# Altium PCB UE-12864LCD-V1.0.PcbDoc (part 2 of 2)
Units mm, origin at the board's own origin, x right, y up, seen from the top; angles counter-clockwise.
Board outline 230.2 x 185.24 mm, 2 copper layers (Top Layer, Bottom Layer); 288 components, 149 nets, 862 pads, 465 vias.
Unrouted connection lines stored in the file: 29.
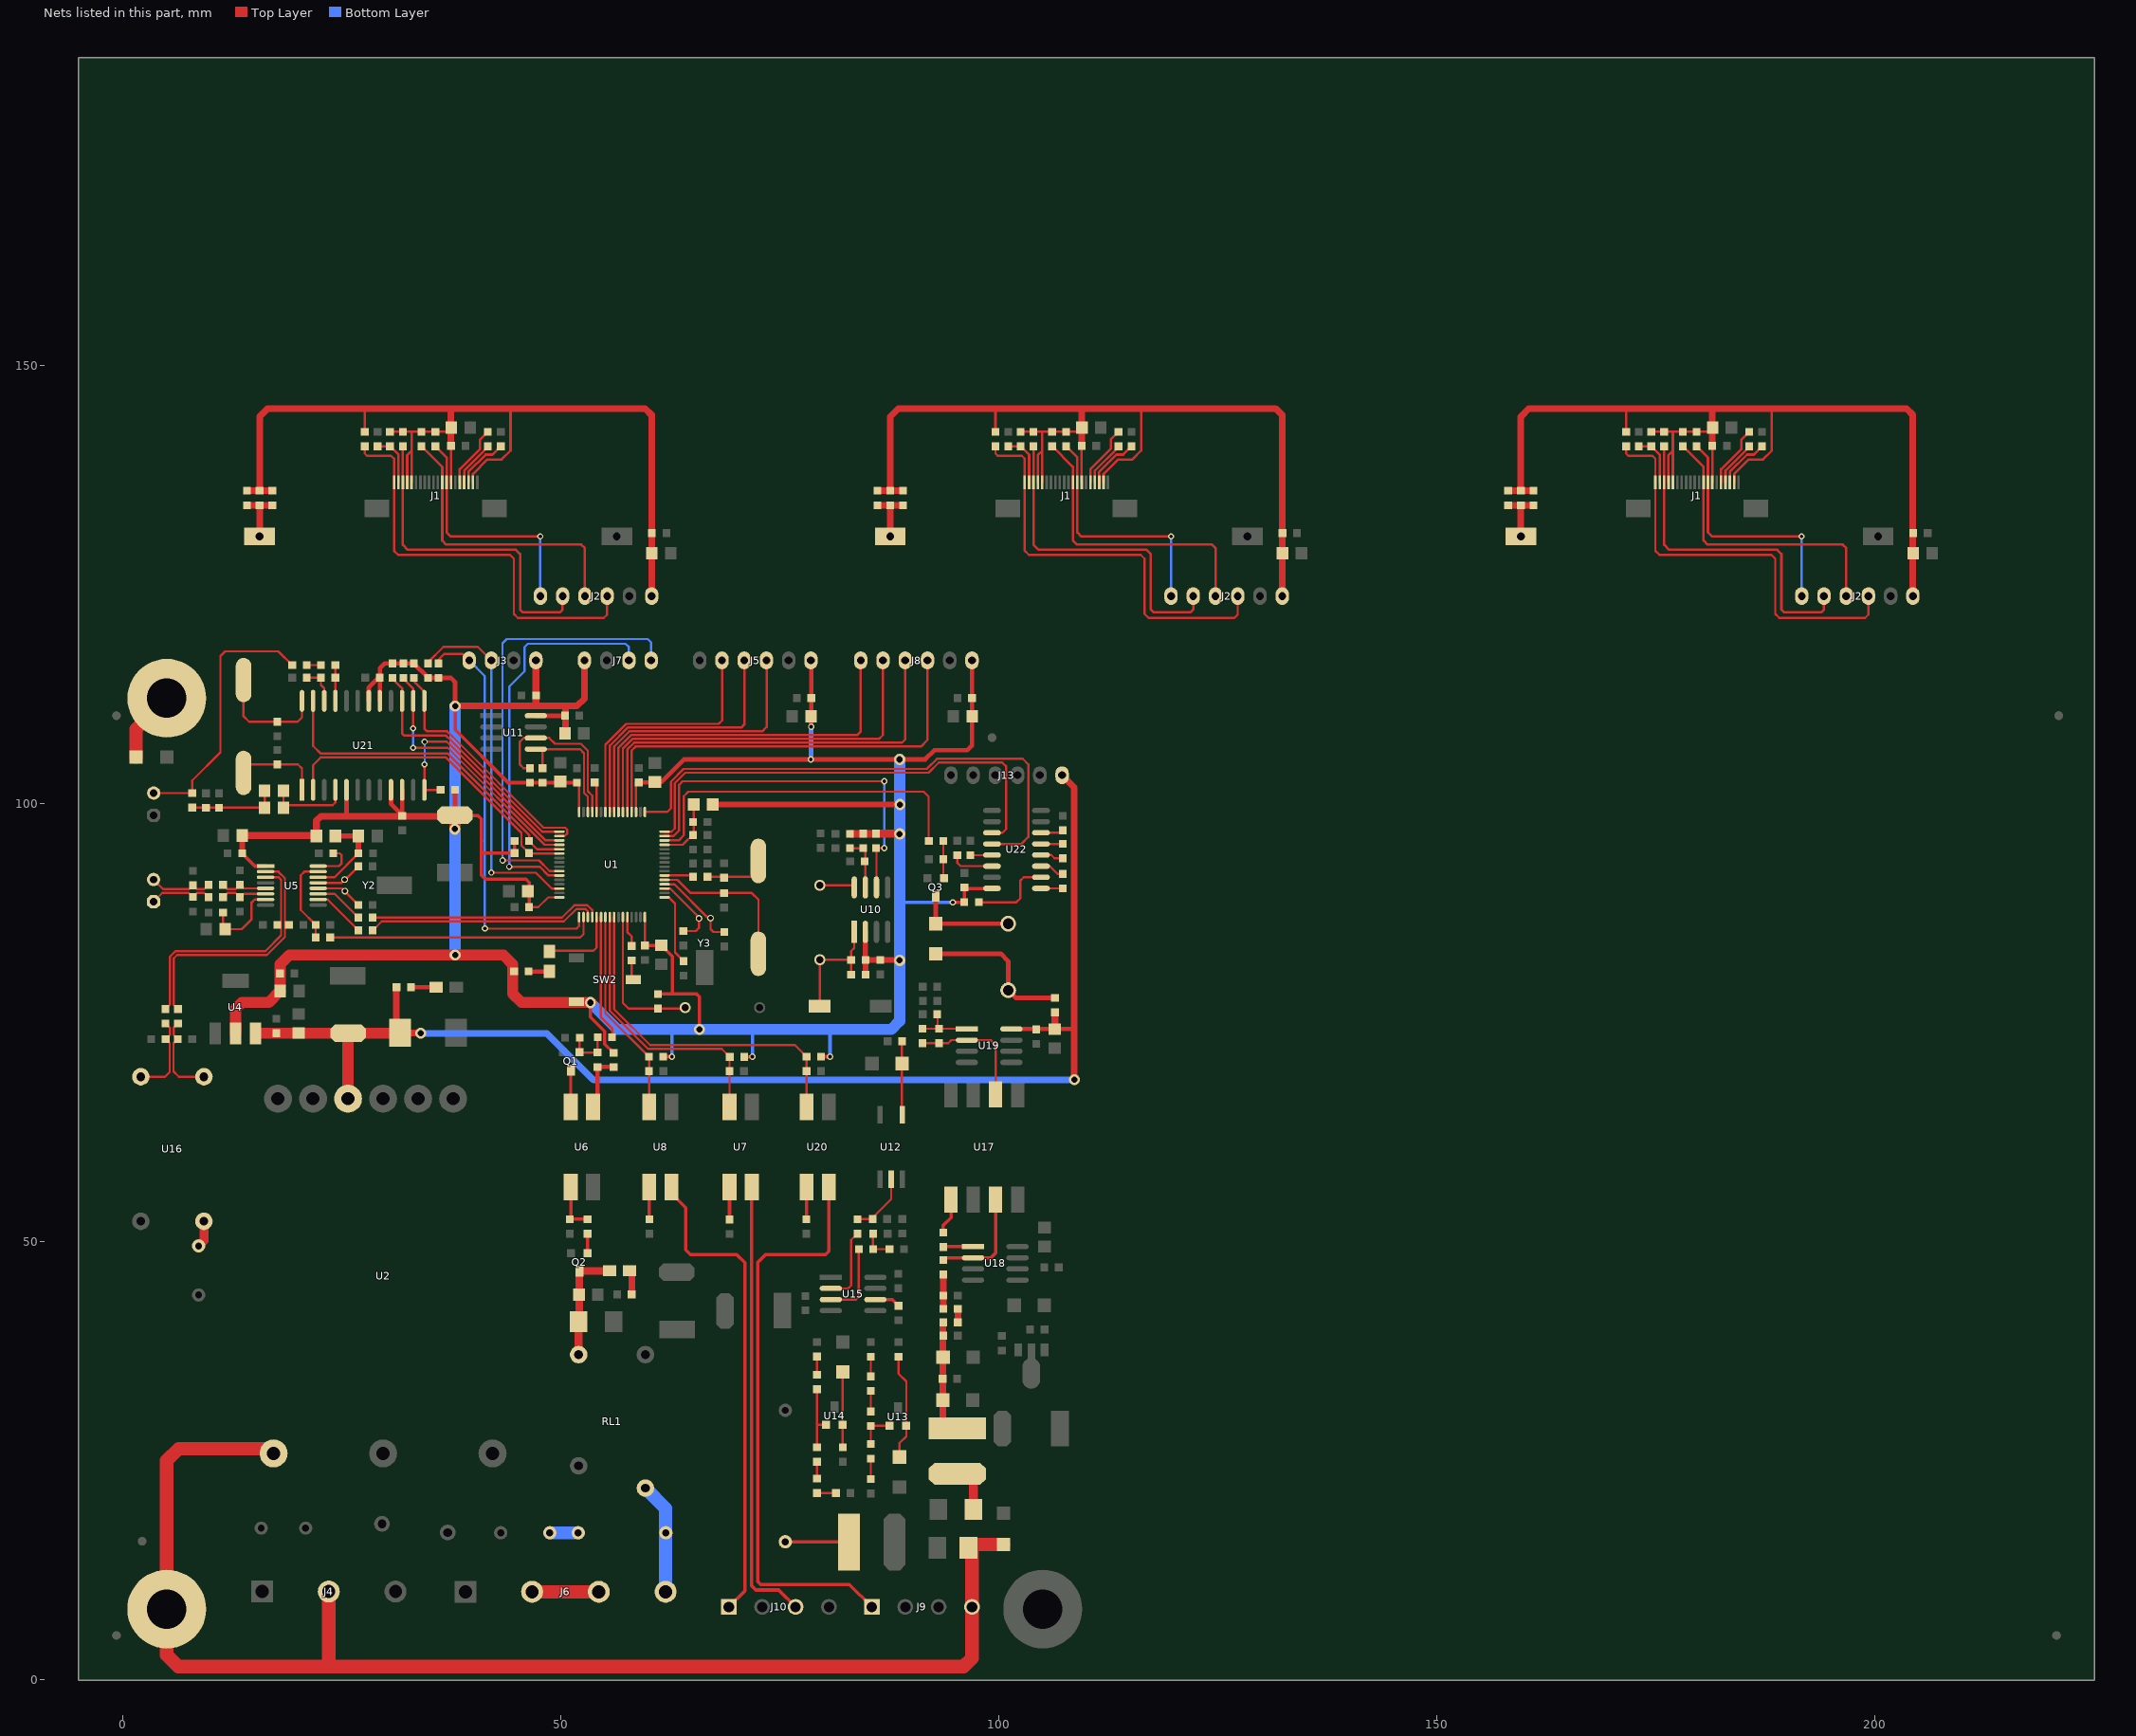
[diagram p2: the nets of this part, all layers, seen from the top]

## Via types
v1: diameter 0.711, hole 0.406, Top Layer to Bottom Layer, tented both sides, 452 vias
v2: diameter 1.27, hole 0.711, Top Layer to Bottom Layer, tented both sides, 13 vias

## Nets (pads, with @x,y where several pads share a name; then routed paths per layer and width w, separated by ;. In a path a pad name is that pad's centre, name@x,y a point inside that pad or via, vN(x,y) a via of type N, cw(c..) or ccw(c..) an arc to the next point about the centre after c; other vN are vias at no path point) (continued)
DIS_RES: C1.2@29.058,140.754 C1.2@101.058,140.754 C1.2@173.058,140.754 J1.2 R1.2@30.48,140.754 R1.2@102.48,140.754 R1.2@174.48,140.754 | length 17.8
  Top Layer w0.279: C1.2@29.058,140.754 R1.2@30.48,140.754 31.448,139.785 J1.2@31.448,136.639 ; C1.2@101.058,140.754 R1.2@102.48,140.754 103.448,139.785 J1.2@103.448,136.639 ; C1.2@173.058,140.754 R1.2@174.48,140.754 175.448,139.785 J1.2@175.448,136.639
DP3V3: C2.2@60.389,130.835 C2.2@132.389,130.835 C2.2@204.389,130.835 C3.1@96.965,109.931 C3.2@37.452,140.792 C3.2@109.452,140.792 C3.2@181.452,140.792 C4.1@60.389,128.549 C4.1@132.389,128.549 C4.1@204.389,128.549 C4.2@96.939,112.014 C5.1@37.478,142.9 C5.1@109.478,142.9 C5.1@181.478,142.9 C7.1@17.945,78.562 C8.1 C13.1 C14.1 C15.1 C16.1 C27.2 C29.1 C30.1 C31.1 C32.1 C33.1 C34.1 C35.1 C36.1 C42.1 C43.1 C44.2 C45.1 C71.1 C76.2 C79.2 C80.2 EC5.1 FB1.1 J1.4 J1.5 J1.14 J1.19 J2.1 J3.4 J5.6 J7.1 J8.6 LF1.1 R1.1@30.48,142.405 R1.1@102.48,142.405 R1.1@174.48,142.405 R1.2@36.017,114.313 R2.2 R3.1@61.087,78.219 R3.2@34.087,142.405 R3.2@106.087,142.405 R3.2@178.087,142.405 R4.2 R5.2 R6.1 R7.1@14.148,135.674 R7.1@86.148,135.674 R7.1@158.148,135.674 R8.1@17.043,135.674 R8.1@89.043,135.674 R8.1@161.043,135.674 R12.2 R14.2 R25.2 R27.2 R32.2 R34.1 R35.1 R36.1 R37.1 R38.1 R73.2 R76.2 R77.2 R78.2 R79.2 R80.2 R81.2 SW2.3 U1.19 U1.32 U1.48 U1.64 U4.2 U5.1 U10.2 U11.8 U21.5 U21.9 U21.10 U21.17 U21.18 U22.16 | length 791.9
  Top Layer w0.254: C30.1@46.368,88.138 47.422,88.138 48.539,89.256 U1.48@49.824,89.256 ; U1.32@52.074,99.006 C36.1@52.074,102.353 ; U1.19@58.574,99.006 C34.1@58.574,102.374 ; C32.1@59.574,83.771 U1.64@59.574,87.006
  Top Layer w0.279: R2.2@27.61,142.405 27.61,144.932 27.737,145.059 ; R1.1@30.48,142.405 32.969,142.405 ; J1.4@32.448,136.639 32.448,139.738 32.948,140.238 ; J1.5@32.948,136.639 32.948,142.384 32.969,142.405 ; 37.44,145.059 37.448,145.051 ; J1.14@37.448,136.639 C3.2@37.448,140.754 ; C5.1@37.448,142.405 R5.2@35.662,142.405 32.969,142.405 ; J1.19@39.948,136.639 39.948,137.586 41.605,139.243 43.231,139.243 44.247,140.259 44.247,144.983 44.171,145.059 ; R2.2@99.61,142.405 99.61,144.932 99.737,145.059 ; R1.1@102.48,142.405 104.969,142.405 ; J1.4@104.448,136.639 104.448,139.738 104.948,140.238 ; J1.5@104.948,136.639 104.948,142.384 104.969,142.405 ; R5.2@107.662,142.405 104.969,142.405 ; R5.2@107.662,142.405 C5.1@109.448,142.405 ; 109.44,145.059 109.448,145.051 ; J1.14@109.448,136.639 C3.2@109.448,140.754 ; J1.19@111.948,136.639 111.948,137.586 113.605,139.243 115.231,139.243 116.247,140.259 116.247,144.983 116.171,145.059 ; R2.2@171.61,142.405 171.61,144.932 171.737,145.059 ; R1.1@174.48,142.405 176.969,142.405 ; J1.4@176.448,136.639 176.448,139.738 176.948,140.238 ; J1.5@176.948,136.639 176.948,142.384 176.969,142.405 ; R5.2@179.662,142.405 176.969,142.405 ; R5.2@179.662,142.405 C5.1@181.448,142.405 ; 181.44,145.059 181.448,145.051 ; J1.14@181.448,136.639 C3.2@181.448,140.754 ; J1.19@183.948,136.639 183.948,137.586 185.605,139.243 187.231,139.243 188.247,140.259 188.247,144.983 188.171,145.059
  Top Layer w0.381: C14.1@13.602,94.285 15.062,92.824 U5.1@16.279,92.824 ; v2(37.922,111.1) 37.922,108.397 43.97,102.349 R34.1@46.457,102.349 ; EC5.1@38.165,98.603 40.513,98.603 40.919,98.196 40.919,95.656 ; 40.97,95.707 40.919,95.656 ; R81.2@44.717,95.707 R80.2@44.717,94.31 40.945,94.31 40.919,94.336 ; C30.1@46.368,88.138 46.368,90.957 45.987,91.338 41.377,91.338 40.919,91.796 40.919,94.336 ; R34.1@46.558,102.349 C36.1@51.816,102.349 ; v2(53.365,77.241) 53.365,75.603 55.004,73.965 55.004,72.517 R14.2@56.007,71.514 ; C32.1@59.588,83.757 59.614,83.782 C31.1@61.443,83.782 62.713,82.512 62.713,78.219 ; R3.1@61.087,78.219 65.494,78.219 65.811,77.902 v2(65.811,74.168) ; R27.2@61.684,71.069 v1(62.662,71.069) ; R25.2@70.93,71.044 71.831,71.044 v1(71.857,71.069) ; R73.2@79.693,71.069 v1(80.721,71.069) ; v1(94.742,88.697) C79.2@96.05,88.697 ; C80.2@95.961,90.279 U22.16@99.217,90.279 ; C79.2@96.025,88.748 96.063,88.786 C80.2@96.063,90.386 C80.2@96.083,90.406 ; 40.919,94.336 40.919,95.656
  Top Layer w0.508: 25.518,98.574 U21.5@25.518,101.527 ; U21.18@28.058,111.687 28.058,113.211 C71.1@29.172,114.325 ; U21.17@29.328,111.687 29.328,115.421 29.87,115.964 R76.2@30.785,115.964 R78.2@32.004,115.964 R77.2@33.198,115.964 34.849,114.313 R1.2@36.017,114.313 37.427,114.313 37.922,113.817 v2(37.922,111.1) ; U21.9@30.598,101.527 30.598,99.933 31.55,98.98 C76.2@31.868,98.98 ; U21.10@31.868,101.527 C76.2@31.868,98.98 ; C76.2@31.877,98.971 C76.2@31.868,98.98 ; R79.2@37.91,101.524 37.91,98.859 EC5.1@38.165,98.603 ; U11.8@47.136,109.988 50.501,109.988 C42.1@50.521,110.007 ; C34.1@58.877,102.375 C29.1@60.731,102.375 ; C29.1@60.731,102.426 61.481,102.426 64.059,105.004 v1(78.537,105.004) v2(88.671,105.004) 91.592,105.004 92.634,106.045 96.393,106.045 96.926,106.578 J8.6@96.926,116.307 ; J5.6@78.537,116.307 78.575,116.269 C15.1@78.575,112.014 C16.1@78.575,109.931 ; C16.1@78.55,109.931 78.55,108.75 v1(78.562,108.737)
  Top Layer w0.635: C14.1@13.602,94.285 C13.1@13.602,96.317 ; FB1.1@67.323,99.873 88.671,99.873 v2(88.697,99.847) ; U10.2@84.754,85.312 84.754,82.156 C43.1@84.786,82.124 ; R32.2@84.786,80.422 C43.1@84.786,82.124 ; v2@88.671,82.093 84.817,82.093 C43.1@84.786,82.124
  Top Layer w0.762: C13.1@13.602,96.317 22.035,96.317 LF1.1@22.085,96.266 22.085,98.006 22.606,98.527 37.581,98.527 EC5.1@37.911,98.857 ; R7.1@14.148,135.674 R6.1@15.596,135.674 ; R8.1@17.043,135.674 R6.1@15.596,135.674 ; C3.2@37.448,140.754 C5.1@37.448,142.405 ; C5.1@37.448,142.443 37.448,145.051 ; v2(37.922,111.1) 47.117,111.1 ; J3.4@47.142,116.307 47.142,111.125 47.117,111.1 ; C44.2@50.457,107.975 50.521,108.039 50.521,110.007 50.521,111.1 ; J7.1@52.68,116.307 52.68,111.938 51.841,111.1 50.521,111.1 ; J2.1@60.35,123.647 60.35,144.323 59.614,145.059 44.171,145.059 37.44,145.059 27.737,145.059 16.51,145.059 15.596,144.145 R6.1@15.596,135.674 ; R7.1@86.148,135.674 R6.1@87.596,135.674 ; R8.1@89.043,135.674 R6.1@87.596,135.674 ; C3.2@109.448,140.754 C5.1@109.448,142.405 ; C5.1@109.448,142.443 109.448,145.051 ; J2.1@132.35,123.647 132.35,144.323 131.614,145.059 116.171,145.059 109.44,145.059 99.737,145.059 88.51,145.059 87.596,144.145 R6.1@87.596,135.674 ; R7.1@158.148,135.674 R6.1@159.596,135.674 ; R8.1@161.043,135.674 R6.1@159.596,135.674 ; C3.2@181.448,140.754 C5.1@181.448,142.405 ; C5.1@181.448,142.443 181.448,145.051 ; J2.1@204.35,123.647 204.35,144.323 203.614,145.059 188.171,145.059 181.44,145.059 171.737,145.059 160.51,145.059 159.596,144.145 R6.1@159.596,135.674 ; 47.117,111.1 50.521,111.1
  Top Layer w0.889: R38.1@83.147,96.52 86.246,96.52 86.258,96.533 v2@88.468,96.533
  Top Layer w1.27: U4.2@12.852,73.733 12.852,76.556 13.564,77.267 16.65,77.267 C7.1@17.932,78.549 ; C7.1@17.932,79.235 17.932,81.61 18.999,82.677 v2(37.922,82.677) 43.434,82.677 44.501,81.61 44.501,78.257 45.491,77.267 53.391,77.267 v2(53.365,77.241) ; EC5.1@37.911,98.857 37.922,98.846 v2@37.922,97.053
  Bottom Layer w0.381: 62.56,74.168 62.662,74.066 v1(62.662,71.069) ; v1(71.857,71.069) 71.857,74.168 ; v1(80.721,71.069) 80.721,74.168 ; 88.671,88.29 89.078,88.697 v1(94.742,88.697)
  Bottom Layer w0.508: v1(78.537,105.004) 78.562,105.029 v1(78.562,108.737)
  Bottom Layer w0.635: v2@88.671,99.847 v2(88.697,99.847)
  Bottom Layer w1.27: v2(37.922,82.677) v2(37.922,111.1) ; v2(53.365,77.241) 56.439,74.168 62.56,74.168 v2(65.811,74.168) 71.857,74.168 80.721,74.168 87.706,74.168 88.671,75.133 v2(88.671,82.067) 88.671,88.29 v2(88.671,96.495) 88.671,99.847 v2(88.671,105.004)
  other v2: 37.897,97.053
DVDD: C18.1 C19.1 LF1.2 U5.14 | length 10.3
  Top Layer w0.254: U5.14@22.279,91.554 24.155,91.554 C19.1@26.886,94.285
  Top Layer w0.635: LF1.2@24.244,96.266 26.861,96.266 C19.1@26.861,94.323
FG: C103.1 J4.2 J9.4 LT1.2 pad.1@5,8 pad.1@5.004,111.989 TVS1.1 U2.1 | length 161.7
  Top Layer w1.524: C103.1@1.473,105.283 1.473,108.458 pad.1@5.004,111.989 ; U2.1@17.193,26.334 6.344,26.334 4.98,24.97 4.98,2.767 6.299,1.448 24,1.448 ; J4.2@23.495,10.008 23.495,1.953 24,1.448 ; LT1.2@100.508,15.392 96.92,15.392 TVS1.1@96.528,15 96.926,14.602 J9.4@96.926,8.255 96.926,2.413 95.961,1.448 24,1.448
FM_IRQ: R80.1 U1.38 U21.2 | length 36.7
  Top Layer w0.254: U21.2@21.708,101.527 21.708,104.357 22.581,105.23 36.883,105.23 45.491,96.622 45.491,95.186 R80.1@46.368,94.31 46.422,94.256 U1.38@49.824,94.256
FM_RST: R81.1 U1.37 U21.23 | length 38.6
  Top Layer w0.254: U21.23@21.708,111.687 21.708,106.537 22.583,105.662 37.107,105.662 46.368,96.402 46.368,95.669 47.281,94.756 U1.37@49.824,94.756
IN-ADA: R67.2 U17.3 U18.2 | length 12.4
  Top Layer w0.381: R67.2@93.65,47.841 93.923,48.114 U18.2@97.047,48.114 99.066,48.114 99.621,48.668 U17.3@99.621,54.754
LED_CHARGE1/RESET1: J5.3 U1.25 | length 31.3
  Top Layer w0.254: U1.25@55.574,99.006 55.574,106.582 57.627,108.636 70.587,108.636 70.942,108.991 70.942,116.281 J5.3@70.917,116.307
LED_PWR1/CLK: J5.2 U1.26 | length 29
  Top Layer w0.254: U1.26@55.074,99.006 55.074,106.693 57.448,109.068 67.996,109.068 68.402,109.474 68.402,116.281 J5.2@68.377,116.307
LED_WARNING/RESET2: J5.4 U1.24 | length 33.4
  Top Layer w0.254: U1.24@56.074,99.006 56.074,106.471 57.806,108.204 72.974,108.204 73.482,108.712 73.482,116.281 J5.4@73.457,116.307
NetC6_1: C6.1@41.656,140.754 C6.1@113.656,140.754 C6.1@185.656,140.754 J1.17 | length 15.7
  Top Layer w0.279: J1.17@38.948,136.639 38.948,137.983 41.656,140.691 C6.1@41.656,140.754 ; J1.17@110.948,136.639 110.948,137.983 113.656,140.691 C6.1@113.656,140.754 ; J1.17@182.948,136.639 182.948,137.983 185.656,140.691 C6.1@185.656,140.754
NetC6_2: C6.2@41.656,142.405 C6.2@113.656,142.405 C6.2@185.656,142.405 J1.16 | length 21.3
  Top Layer w0.279: J1.16@38.448,136.639 38.448,138.143 40.767,140.462 40.767,141.516 C6.2@41.656,142.405 ; J1.16@110.448,136.639 110.448,138.143 112.767,140.462 112.767,141.516 C6.2@113.656,142.405 ; J1.16@182.448,136.639 182.448,138.143 184.767,140.462 184.767,141.516 C6.2@185.656,142.405
NetC7_1: C7.1@43.129,140.754 C7.1@115.129,140.754 C7.1@187.129,140.754 J1.18 | length 18.3
  Top Layer w0.279: J1.18@39.448,136.639 39.448,137.836 41.414,139.802 42.177,139.802 C7.1@43.129,140.754 ; J1.18@111.448,136.639 111.448,137.836 113.414,139.802 114.177,139.802 C7.1@115.129,140.754 ; J1.18@183.448,136.639 183.448,137.836 185.414,139.802 186.177,139.802 C7.1@187.129,140.754
NetC9_1: C9.1 U1.1 | length 8.5
  Top Layer w0.254: U1.1@61.824,89.256 62.306,89.256 63.017,88.544 63.017,82.969 C9.1@64.008,81.978
NetC10_1: C10.1 U5.16 | length 4.8
  Top Layer w0.254: U5.16@22.279,92.824 24.651,92.824 24.968,93.142 24.968,94.056 24.74,94.285 C10.1@24.016,94.285
NetC17_2: C17.2 D1.1 L3.2 Q2.2 RL1.1 | length 13.1
  Top Layer w0.9: RL1.1@52.019,37.059 52.026,37.065 D1.1@52.026,40.818 52.097,40.889 Q2.2@52.097,46.615 55.52,46.615 L3.2@55.548,46.643
NetC20_1: C20.1 R15.1 Y1.2 | length 7.4
  Top Layer w0.254: R15.1@66.739,91.618 72.288,91.618 Y1.2@72.288,93.438
NetC21_1: C21.1 R19.2 | length 3.2
  Bottom Layer w1.5: R19.2@48.729,16.713 C21.1@51.972,16.713
NetC22_1: C22.1 R14.1 U6.1 | length 6.6
  Top Layer w0.508: U6.1@53.663,65.326 54.174,65.838 C22.1@54.174,69.892 55.978,69.892 R14.1@56.007,69.863
NetC22_2: C22.2 Q1.1 R17.1 R20.1 | length 5.5
  Top Layer w0.254: R20.1@52.134,73.228 52.134,71.549 52.14,71.543 C22.2@54.174,71.543 54.191,71.559 R17.1@54.191,73.279
NetC24_1: C24.1 C25.1 U5.7 | length 9.1
  Top Layer w0.254: C25.1@11.417,87.528 11.417,85.877 C24.1@11.671,85.623 13.551,85.623 14.681,86.754 14.681,88.671 15.024,89.014 U5.7@16.279,89.014
NetC43_2: C43.2 R32.1 SW3.1 SW4.1 U10.1 | length 13.9
  Top Layer w0.254: SW4.1@79.533,76.835 79.564,76.866 SW3.1@79.564,82.133 83.126,82.133 C43.2@83.135,82.124 ; R32.1@83.135,80.422 C43.2@83.135,82.124 ; U10.1@83.484,85.312 83.484,83.464 83.135,83.116 C43.2@83.135,82.124
NetC48_1: C48.1 D5.2 U13.3 | length 12.2
  Top Layer w0.254: C48.1@88.546,36.823 88.546,34.873 89.431,33.987 U13.3@89.431,28.924 89.431,27.735 88.646,26.949 D5.2@88.646,25.362
NetC49_2: C49.2 R37.2 R48.1 U10.7 | length 6.5
  Top Layer w0.254: R48.1@82.995,94.869 84.506,94.869 84.506,95.098 84.754,94.85 U10.7@84.754,90.392
NetC53_1: C53.1 D2.2 U14.3 | length 8.6
  Top Layer w0.254: C53.1@82.169,26.479 82.171,26.481 D2.2@82.171,35.065
NetC58_1: C58.1 R68.1 R70.1 U19.1 | length 6.9
  Top Layer w0.254: C58.1@91.272,74.261 R68.1@93.177,74.26 ; R70.1@93.205,75.946 93.015,75.755 93.015,74.423 R68.1@93.177,74.26 ; U19.1@96.346,74.229 96.314,74.261 R68.1@93.177,74.26
NetC58_2: C58.2 R68.2 U17.6 U19.2 | length 14.4
  Top Layer w0.254: C58.2@91.272,72.61 94.225,72.61 94.574,72.959 U19.2@96.346,72.959 99.076,72.959 99.621,72.413 U17.6@99.621,66.754
NetC59_1: C59.1 C60.1 DC2.1 DC3.1 L5.2 R65.1 | length 13.7
  Top Layer w0.762: R65.1@93.663,40.742 93.59,40.669 93.59,28.61 L5.2@95.148,28.61
NetC68_2: C68.2 R74.2 | length 1.6
  Top Layer w0.254: C68.2@20.968,115.773 R74.2@22.593,115.773
NetC69_1: C69.1 R75.1 U21.22 | length 4.4
  Top Layer w0.254: C69.1@20.968,114.325 R75.1@22.593,114.325 22.593,113.5 22.978,113.115 U21.22@22.978,111.687
NetC74_1: C74.1 U21.1 Y4.1 | length 9.6
  Top Layer w0.254: Y4.1@13.614,104.149 13.898,104.432 17.958,104.432 19.977,104.432 20.438,103.971 U21.1@20.438,101.527
NetC75_2: C75.2 U21.24 Y4.2 | length 13.8
  Top Layer w0.254: Y4.2@13.614,114.063 Y4.2@13.614,114.749 ; Y4.2@13.767,114.063 13.767,109.931 14.389,109.309 C75.2@17.628,109.309 19.952,109.309 20.438,109.795 U21.24@20.438,111.687
NetC77_1: C77.1 U22.3 | length 2.9
  Top Layer w0.254: U22.3@104.805,92.819 105.809,92.819 106.693,91.935 C77.1@107.29,91.935
NetC77_2: C77.2 U22.1 | length 2.5
  Top Layer w0.254: U22.1@104.805,90.279 107.284,90.279 C77.2@107.29,90.284
NetC78_1: C78.1 U22.5 | length 2.5
  Top Layer w0.254: U22.5@104.805,95.359 107.284,95.359 C78.1@107.29,95.364
NetC78_2: C78.2 U22.4 | length 2.6
  Top Layer w0.254: U22.4@104.805,94.089 105.961,94.089 106.337,93.713 C78.2@107.29,93.713
NetC79_1: C79.1 U22.2 | length 9.5
  Top Layer w0.254: C79.1@97.701,88.697 101.981,88.697 102.464,89.179 102.464,91.186 102.827,91.549 U22.2@104.805,91.549
NetC81_2: C81.2 U22.6 | length 2.6
  Top Layer w0.254: U22.6@104.805,96.629 107.005,96.629 C81.2@107.29,96.914
NetD3_1: D3.1 Q3.2 U9.2 | length 11.7
  Top Layer w0.508: Q3.2@92.788,89.618 92.788,86.248 D3.1@92.786,86.246 101.064,86.246 U9.2@101.067,86.248
NetD3_2: D3.2 R33.1 U9.1 | length 17.6
  Top Layer w0.508: D3.2@92.786,82.817 100.216,82.817 101.067,81.966 U9.1@101.067,78.648 101.927,77.787 R33.1@106.401,77.787
NetD4_2: D4.2 R45.2 U12.1 | length 8.5
  Top Layer w0.254: R45.2@88.938,72.949 88.938,64.488 U12.1@88.972,64.454
NetD6_2: D6.2 L5.1 | length 5.9
  Top Layer w1.016: L5.1@95.148,23.41 96.91,23.41 97.098,23.222 D6.2@97.098,19.38
NetJ3_1: J3.1@15.596,130.454 J3.1@87.596,130.454 J3.1@159.596,130.454 R6.2 R7.2@14.148,134.023 R7.2@86.148,134.023 R7.2@158.148,134.023 R8.2@17.043,134.023 R8.2@89.043,134.023 R8.2@161.043,134.023 | length 19.4
  Top Layer w0.762: R7.2@14.148,134.023 R6.2@15.596,134.023 ; J3.1@15.596,130.454 R6.2@15.596,134.023 ; R8.2@17.043,134.023 R6.2@15.596,134.023 ; R7.2@86.148,134.023 R6.2@87.596,134.023 ; J3.1@87.596,130.454 R6.2@87.596,134.023 ; R8.2@89.043,134.023 R6.2@87.596,134.023 ; R7.2@158.148,134.023 R6.2@159.596,134.023 ; J3.1@159.596,130.454 R6.2@159.596,134.023 ; R8.2@161.043,134.023 R6.2@159.596,134.023
NetJ6_2: J6.2 J6.3 | length 15.2
  Top Layer w1.5: J6.2@46.711,9.982 J6.3@54.331,9.982
  Bottom Layer w1.5: J6.2@46.711,9.982 J6.3@54.331,9.982
NetJ11_1: J11.1 R60.1 R62.1 | length 7.3
  Top Layer w0.254: J11.1@3.483,88.75 4.497,89.764 7.506,89.764 R60.1@7.976,89.294 8.445,89.764 9.284,89.764 R62.1@9.766,89.281
NetJ11_2: J11.2 R53.1 R57.2 | length 7.3
  Top Layer w0.254: J11.2@3.483,91.29 4.577,90.195 7.531,90.195 R57.2@7.976,90.64 8.42,90.195 9.284,90.195 R53.1@9.766,90.678
NetL1_1: L1.1 R8.2@32.88,78.994 | length 2.9
  Top Layer w0.508: R8.2@32.88,78.994 L1.1@35.757,78.994
NetL2_1: L2.1 R12.1 | length 2.4
  Top Layer w0.508: R12.1@46.292,80.797 L2.1@48.692,80.797
NetL3_1: L3.1 R13.1 | length 2.8
  Top Layer w0.762: L3.1@57.834,46.643 58.077,46.4 R13.1@58.077,43.917
NetL4_2: L4.2 R23.2 | length 7.3
  Top Layer w0.381: R23.2@75.616,15.69 82.878,15.69 L4.2@82.896,15.672
NetLF2_2: LF2.2 LF3.2 U21.4 | length 9.6
  Top Layer w0.254: LF2.2@18.326,101.448 LF3.2@18.326,99.466 18.631,99.771 23.927,99.771 24.248,100.092 U21.4@24.248,101.527
NetQ1_2: Q1.2 U6.2 | length 4.2
  Top Layer w0.308: U6.2@51.123,65.326 51.123,69.5 Q1.2@51.154,69.532
NetQ2_1: Q2.1 R21.2 | length 2.2
  Top Layer w0.381: R21.2@53.035,50.863 53.035,48.675 Q2.1@53.063,48.647
NetQ3_1: Q3.1 R47.1 R49.2 | length 4.3
  Top Layer w0.254: R47.1@93.663,95.682 R49.2@93.663,93.599 93.663,91.512 Q3.1@93.753,91.421
NetR3_2: R3.2@61.087,76.568 SW1.1 U1.59 | length 17.2
  Top Layer w0.254: U1.59@57.074,87.006 57.074,77.216 57.72,76.57 SW1.1@64.175,76.57
NetR9_2: R9.2 U1.50 | length 31
  Top Layer w0.254: R9.2@23.66,84.684 52.197,84.684 52.574,85.06 U1.50@52.574,87.006
NetR10_2: R10.2 U1.28 | length 3.4
  Top Layer w0.254: U1.28@54.077,99.009 R10.2@54.077,102.375
NetR11_1: R11.1 SW2.2 | length 2.3
  Top Layer w0.254: R11.1@58.064,82.055 58.064,80.06 SW2.2@58.266,79.858
NetR11_2: R11.2 U1.60 | length 3.5
  Top Layer w0.254: U1.60@57.574,87.006 57.574,85.301 58.064,84.811 R11.2@58.064,83.706
NetR16_1: R16.1 U5.11 | length 5.7
  Top Layer w0.254: U5.11@22.279,89.649 24.155,89.649 R16.1@26.861,86.944
NetR18_1: R18.1 U5.10 | length 6.1
  Top Layer w0.254: U5.10@22.279,89.014 23.368,89.014 R18.1@26.886,85.496
NetR21_1: R21.1 R22.1 U6.3 | length 5.7
  Top Layer w0.381: U6.3@51.123,56.182 51.123,52.634 R22.1@51.003,52.514 R21.1@53.035,52.514
NetR24_1: R24.1 U7.1 | length 3.7
  Top Layer w0.254: R24.1@69.24,52.489 R24.1@69.248,52.497
  Top Layer w0.381: R24.1@69.248,52.497 U7.1@69.248,56.182
NetR26_1: R26.1 U8.1 | length 3.7
  Top Layer w0.381: U8.1@60.079,56.182 60.096,56.164 R26.1@60.096,52.514
NetR28_2: R28.2 U15.6 | length 2.9
  Top Layer w0.381: U15.6@85.897,43.339 87.84,43.339 R28.2@88.544,42.634
NetR29_1: R29.1 R41.2 | length 2.1
  Top Layer w0.254: R41.2@79.223,34.76 79.224,34.761 R29.1@79.224,36.848
NetR30_1: R30.1 R40.2 | length 2.3
  Top Layer w0.254: R40.2@85.371,34.564 R30.1@85.371,36.823
NetR31_2: R31.2 R43.1 R44.2 | length 3.6
  Top Layer w0.254: R31.2@85.636,50.851 85.636,49.124 R44.2@85.662,49.098 R43.1@87.516,49.098
NetR39_2: R39.2 R46.2 U12.5 | length 7
  Top Layer w0.254: R46.2@83.845,52.514 85.573,52.514 R39.2@85.585,52.527 ; R39.2@85.585,52.692 87.702,54.809 U12.5@87.702,57.054
NetR40_1: R40.1 R42.2 | length 2.3
  Top Layer w0.254: R42.2@85.369,30.569 85.369,32.911 R40.1@85.371,32.913
NetR41_1: R41.1 R50.2 U14.1 | length 7.7
  Top Layer w0.254: R41.1@79.223,33.109 79.223,28.981 ; R50.2@79.299,26.479 79.223,26.556 79.223,28.981 ; U14.1@80.262,29.051 79.292,29.051 79.223,28.981
NetR42_1: R42.1 R51.2 U13.1 | length 4.2
  Top Layer w0.254: R51.2@85.371,26.84 85.369,26.842 85.369,28.918 85.376,28.924 U13.1@87.526,28.924
NetR44_1: R44.1 U15.3 | length 8.8
  Top Layer w0.254: U15.3@80.817,43.339 83.674,43.339 84.011,43.675 R44.1@84.011,49.098
NetR46_1: R46.1 U15.2 | length 8.7
  Top Layer w0.254: U15.2@80.817,44.609 82.785,44.609 83.134,44.958 83.134,50.152 R46.1@83.845,50.863
NetR50_1: R50.1 R52.2 | length 1.9
  Top Layer w0.254: R52.2@79.224,22.898 R50.1@79.224,24.828
NetR51_1: R51.1 R55.2 | length 2.3
  Top Layer w0.254: R55.2@85.369,22.847 85.369,25.188 R51.1@85.371,25.189
NetR52_1: R52.1 R54.2 | length 2.2
  Top Layer w0.254: R52.1@79.224,21.247 81.382,21.247 R54.2@81.394,21.26
NetR56_1: R56.1 R59.2 U16.1 | length 9.8
  Top Layer w0.254: R56.1@6.274,74.867 5.791,74.384 5.791,73.553 R59.2@6.261,73.083 5.766,72.588 5.766,69.393 6.38,68.778 U16.1@9.239,68.778
NetR58_2: R58.2 U16.3 | length 3.1
  Top Layer w1.016: R58.2@8.636,49.466 9.239,50.069 U16.3@9.239,52.278
NetR61_1: R61.1 R63.1 U16.2 | length 9.7
  Top Layer w0.254: U16.2@2.039,68.778 4.796,68.778 5.334,69.317 5.334,72.606 R61.1@4.864,73.076 5.359,73.571 5.359,74.358 R63.1@4.851,74.867
NetR64_1: R64.1 U18.1 | length 3.4
  Top Layer w0.381: R64.1@93.65,49.34 93.694,49.384 U18.1@97.047,49.384
NetR64_2: R64.2 U17.1 | length 4.1
  Top Layer w0.381: R64.2@93.65,50.99 93.65,51.816 94.541,52.707 U17.1@94.541,54.754
NetR65_2: R65.2 R66.1 | length 1.5
  Top Layer w0.762: R65.2@95.314,40.742 R66.1@95.313,42.266
NetR66_2: R66.2 R67.1 R69.2 | length 3.9
  Top Layer w0.762: R67.1@93.65,46.19 93.662,46.177 R66.2@93.662,42.266
NetR72_1: R72.1 U20.1 | length 3.7
  Top Layer w0.381: R72.1@78.029,52.514 78.029,56.174 U20.1@78.036,56.182
NetR74_1: R74.1 R75.2 U21.21 | length 4.1
  Top Layer w0.254: R74.1@24.244,115.773 24.248,115.769 U21.21@24.248,111.687
NetR82_1: R82.1 U22.13 | length 2.5
  Top Layer w0.254: R82.1@96.749,94.069 U22.13@99.197,94.069
  Top Layer w0.381: U22.13@99.197,94.069 U22.13@99.217,94.089
NetR83_1: R83.1 U22.14 | length 5
  Top Layer w0.254: R83.1@95.25,94.069 95.25,93.193 95.623,92.819 U22.14@99.217,92.819
NetSW3_2: SW3.2 U10.8 | length 4
  Top Layer w0.254: SW3.2@79.564,90.633 83.243,90.633 U10.8@83.484,90.392
OSC1: C23.1 U5.13 Y2.2 | length 5.3
  Top Layer w0.254: U5.13@22.279,90.919 24.938,90.919 Y2.2@25.307,91.288 ; Y2.2@25.561,91.237 25.561,91.486 C23.1@26.861,92.786
OSC2: C28.1 U5.12 Y2.1 | length 5.4
  Top Layer w0.254: U5.12@22.279,90.284 24.968,90.284 C28.1@26.861,88.392
OSC32_IN: C26.1 U1.3 Y3.1 | length 8.4
  Top Layer w0.254: U1.3@61.824,90.256 62.474,90.256 65.761,86.969 Y3.1@65.761,86.86 65.761,85.776 65.392,85.407 C26.1@63.983,85.407
OSC32_OUT: C39.1 U1.4 Y3.2 | length 9.8
  Top Layer w0.254: U1.4@61.824,90.756 62.94,90.756 66.81,86.885 Y3.2@67.081,86.885 67.081,85.623 67.399,85.306 C39.1@68.656,85.306
OSC_IN: C11.1 U1.5 Y1.1 | length 17.9
  Top Layer w0.254: U1.5@61.824,91.256 63.303,91.256 64.808,89.751 C11.1@68.631,89.751 71.793,89.751 72.542,89.002 72.542,83.092 Y1.1@72.288,82.838
OSC_OUT: R15.2 U1.6 | length 3.3
  Top Layer w0.254: U1.6@61.824,91.756 64.95,91.756 R15.2@65.088,91.618
RST/J: C12.1 R9.1 U5.15 | length 10
  Top Layer w0.254: R9.1@22.009,84.684 C12.1@22.009,86.106 20.295,87.821 20.295,91.77 20.714,92.189 U5.15@22.279,92.189
RUN: L2.2 U1.53 | length 9.1
  Top Layer w0.254: L2.2@48.692,83.083 48.771,83.162 53.724,83.162 54.074,83.512 U1.53@54.074,87.006
RUN_BUZZER: R47.2 U1.14 | length 40.4
  Top Layer w0.254: U1.14@61.824,95.756 63.447,95.756 64.033,96.342 64.033,100.813 64.541,101.321 91.415,101.321 91.986,100.749 R47.2@91.986,95.682
RX: C68.1 C70.1 J12.2 | length 30.5
  Top Layer w0.254: J12.2@3.458,101.196 3.498,101.156 C70.1@7.899,101.156 7.899,102.591 11.125,105.816 11.125,116.815 11.659,117.348 17.742,117.348 C68.1@19.317,115.773
RXD1: J7.3 U1.43 | length 45.7
  Top Layer w0.254: v1(44.094,92.761) 47.574,92.761 48.579,91.756 U1.43@49.824,91.756
  Bottom Layer w0.254: v1(44.094,92.761) 44.094,113.309 45.847,115.062 45.847,117.831 46.228,118.212 57.379,118.212 57.76,117.831 J7.3@57.76,116.307
RXD2: U1.17 U22.12 | length 61.1
  Top Layer w0.254: U1.17@59.574,99.006 62.125,99.006 62.56,99.441 62.56,102.464 64.008,103.911 91.77,103.911 92.939,105.08 102.718,105.08 103.378,104.419 103.378,96.164 102.573,95.359 U22.12@99.217,95.359
RXD3: R16.2 U1.52 | length 26.7
  Top Layer w0.254: R16.2@28.512,86.944 50.114,86.944 51.537,88.367 53.01,88.367 53.574,87.803 U1.52@53.574,87.006
S_DIS_CS: J1.1 J2.3 J8.4 R2.1@27.61,140.754 R2.1@99.61,140.754 R2.1@171.61,140.754 U1.20 | length 195.5
  Top Layer w0.254: R2.1@27.61,140.754 27.61,139.929 27.864,139.675 30.607,139.675 30.948,139.333 J1.1@30.948,136.639 30.948,128.818 31.42,128.346 44.196,128.346 44.628,127.914 44.628,121.615 45.085,121.158 54.889,121.158 55.27,121.539 J2.3@55.27,123.647 ; U1.20@58.074,99.006 58.074,106.029 58.522,106.477 91.11,106.477 91.846,107.213 J8.4@91.846,116.307 ; R2.1@99.61,140.754 99.61,139.929 99.864,139.675 102.607,139.675 102.948,139.333 J1.1@102.948,136.639 102.948,128.818 103.42,128.346 116.196,128.346 116.628,127.914 116.628,121.615 117.085,121.158 126.889,121.158 127.27,121.539 J2.3@127.27,123.647 ; R2.1@171.61,140.754 171.61,139.929 171.864,139.675 174.607,139.675 174.948,139.333 J1.1@174.948,136.639 174.948,128.818 175.42,128.346 188.196,128.346 188.628,127.914 188.628,121.615 189.085,121.158 198.889,121.158 199.27,121.539 J2.3@199.27,123.647
S_DIS_RS: J1.3 J2.5 J8.2 R4.1 U1.22 | length 160.3
  Top Layer w0.254: U1.22@57.074,99.006 57.074,106.25 58.164,107.34 86.309,107.34 86.766,107.798 J8.2@86.766,116.307
  Top Layer w0.279: R4.1@31.953,140.754 31.948,140.749 J1.3@31.948,136.639 31.948,129.494 32.512,128.93 44.856,128.93 45.339,128.448 45.339,122.123 45.669,121.793 49.86,121.793 50.19,122.123 J2.5@50.19,123.647 ; R4.1@103.953,140.754 103.948,140.749 J1.3@103.948,136.639 103.948,129.494 104.512,128.93 116.856,128.93 117.339,128.448 117.339,122.123 117.669,121.793 121.86,121.793 122.19,122.123 J2.5@122.19,123.647 ; R4.1@175.953,140.754 175.948,140.749 J1.3@175.948,136.639 175.948,129.494 176.512,128.93 188.856,128.93 189.339,128.448 189.339,122.123 189.669,121.793 193.86,121.793 194.19,122.123 J2.5@194.19,123.647
S_DIS_SCK: J1.12 J2.4 J8.3 R3.1@34.087,140.754 R3.1@106.087,140.754 R3.1@178.087,140.754 U1.21 | length 149.9
  Top Layer w0.254: U1.21@57.574,99.006 57.574,106.139 58.343,106.909 88.925,106.909 89.306,107.29 J8.3@89.306,116.307
  Top Layer w0.279: R3.1@34.087,140.754 36.448,138.392 J1.12@36.448,136.639 36.448,129.998 36.906,129.54 52.324,129.54 52.73,129.134 J2.4@52.73,123.647 ; R3.1@106.087,140.754 108.448,138.392 J1.12@108.448,136.639 108.448,129.998 108.906,129.54 124.324,129.54 124.73,129.134 J2.4@124.73,123.647 ; R3.1@178.087,140.754 180.448,138.392 J1.12@180.448,136.639 180.448,129.998 180.906,129.54 196.324,129.54 196.73,129.134 J2.4@196.73,123.647
S_DIS_SDA: J1.13 J2.6 J8.1 R5.1 U1.23 | length 128.1
  Top Layer w0.254: U1.23@56.574,99.006 56.574,106.361 57.985,107.772 83.82,107.772 84.226,108.179 J8.1@84.226,116.307
  Top Layer w0.279: R5.1@35.662,140.754 36.948,139.467 J1.13@36.948,136.639 36.948,130.92 37.414,130.454 v1(47.65,130.454) ; R5.1@107.662,140.754 108.948,139.467 J1.13@108.948,136.639 108.948,130.92 109.414,130.454 v1(119.65,130.454) ; R5.1@179.662,140.754 180.948,139.467 J1.13@180.948,136.639 180.948,130.92 181.414,130.454 v1(191.65,130.454)
  Bottom Layer w0.279: J2.6@47.65,123.647 v1(47.65,130.454) ; J2.6@119.65,123.647 v1(119.65,130.454) ; J2.6@191.65,123.647 v1(191.65,130.454)
S_RF_CS: R76.1 U1.33 U21.15 | length 29.4
  Top Layer w0.254: R76.1@30.785,114.313 30.785,114.212 31.868,113.129 U21.15@31.868,111.687 31.868,107.985 32.131,107.721 36.88,107.721 37.413,107.188 37.428,107.188 47.861,96.756 U1.33@49.824,96.756
S_RF_MISO: R79.1 U1.35 U21.12 | length 27.4
  Top Layer w0.254: v1(34.417,104.445) 34.408,104.436 U21.12@34.408,101.527 34.411,101.524 R79.1@36.259,101.524 ; v1(34.442,107.01) 34.468,107.036 36.955,107.036 37.234,106.756 37.249,106.756 48.25,95.756 U1.35@49.824,95.756
  Bottom Layer w0.254: v1(34.417,104.445) 34.442,104.47 v1(34.442,107.01)
S_RF_MOSI: R78.1 U1.36 U21.14 | length 29.6
  Top Layer w0.254: R78.1@32.004,114.313 32.004,114.186 33.138,113.053 U21.14@33.138,111.687 33.122,111.671 v1(33.122,108.534) ; v1(33.122,106.324) 37.07,106.324 48.139,95.256 U1.36@49.824,95.256
  Bottom Layer w0.254: v1@33.122,106.477 v1@33.122,108.509
S_RF_SCK: R77.1 U1.34 U21.13 | length 28.8
  Top Layer w0.254: R77.1@33.198,114.313 33.198,113.944 34.408,112.734 U21.13@34.408,111.687 34.408,108.518 34.722,108.204 37.008,108.204 37.592,107.62 37.607,107.62 48.016,97.21 50.492,97.21 50.728,96.974 50.728,96.567 50.417,96.256 U1.34@49.824,96.256
SCL: R34.2 U1.29 U11.6 | length 19.7
  Top Layer w0.254: R34.2@46.457,104 45.733,104 45.314,104.419 45.314,107.036 45.726,107.448 U11.6@47.136,107.448 48.66,107.448 49.327,106.782 52.273,106.782 53.061,105.994 53.061,101.371 53.574,100.858 U1.29@53.574,99.006
SDA: R35.2 U1.30 U11.5 | length 14.7
  Top Layer w0.254: U11.5@47.117,106.159 U11.5@47.136,106.178 52.165,106.178 52.629,105.715 52.629,101.193 53.074,100.748 U1.30@53.074,99.006 ; R35.2@47.904,104.127 U11.5@47.904,106.178
START: C40.1 R25.1 U1.56 U7.4 | length 32.3
  Top Layer w0.254: U1.56@55.574,87.006 55.574,76.327 59.917,71.984 59.975,71.984 60.001,71.958 68.364,71.958 R25.1@69.279,71.044 69.248,71.013 U7.4@69.248,65.326
START-DET: J10.3 U7.2 | length 51.6
  Top Layer w0.381: U7.2@71.788,56.271 71.788,10.66 72.263,10.185 74.854,10.185 J10.3@76.784,8.255
STOP: C41.1 R27.1 U1.55 U8.4 | length 23.8
  Top Layer w0.254: U1.55@55.074,87.006 55.074,76.028 R27.1@60.033,71.069 60.079,71.024 U8.4@60.079,65.326
STOP-DET: J10.1 U8.2 | length 55.4
  Top Layer w0.254: U8.2@62.619,56.182 U8.2@62.619,56.373
  Top Layer w0.381: U8.2@62.619,56.182 62.619,55.466 64.262,53.823 64.262,48.997 64.77,48.489 70.053,48.489 70.993,47.549 70.993,10.084 J10.1@69.164,8.255
STOP-INA: C21.2 J6.4 RL1.4 | length 12.8
  Bottom Layer w1.524: RL1.4@59.639,21.819 61.951,19.507 J6.4@61.951,9.982
SW_V: C67.1 R73.1 U1.57 U20.4 | length 40.5
  Top Layer w0.254: U1.57@56.074,87.006 56.074,76.496 60.179,72.39 76.721,72.39 R73.1@78.042,71.069 78.036,71.064 U20.4@78.036,65.326
SW_V_DET: J9.1 U20.2 | length 66.8
  Top Layer w0.381: U20.2@80.576,56.347 U20.2@80.576,56.182 80.576,48.852 80.213,48.489 73.355,48.489 72.492,47.625 72.492,11.125 72.796,10.82 82.931,10.82 J9.1@85.496,8.255
SWCLK: J3.1@39.522,116.307 R1.1@36.017,115.964 U1.49 | length 47.7
  Top Layer w0.254: R1.1@36.017,115.964 36.017,116.396 36.665,117.043 38.786,117.043 J3.1@39.522,116.307 ; v1@41.351,85.674 51.765,85.674 52.074,85.983 U1.49@52.074,87.006
  Bottom Layer w0.254: J3.1@39.522,116.307 41.3,114.529 41.3,85.725 v1(41.326,85.7)
SWIO: J3.2@42.062,116.307 R2.1@34.823,115.964 U1.46 | length 41.5
  Top Layer w0.254: R2.1@34.823,115.964 34.823,116.09 36.589,117.856 40.513,117.856 J3.2@42.062,116.307 ; v1(42.062,92.075) 47.142,92.075 48.962,90.256 U1.46@49.824,90.256
  Bottom Layer w0.254: v1(42.062,92.075) J3.2@42.062,116.307
SWITCHA: R17.2 U1.54 | length 14.3
  Top Layer w0.254: U1.54@54.574,87.006 54.574,75.576 55.842,74.308 R17.2@55.842,73.279
TX1: C70.2 C72.2 C73.1 LF2.1 LF3.1 | length 10.3
  Top Layer w0.254: C70.2@7.899,99.505 16.129,99.505 LF3.1@16.167,99.466 LF2.1@16.167,101.448
TXD1: J7.4 U1.42 | length 51.2
  Top Layer w0.254: v1(43.332,93.472) 47.498,93.472 48.714,92.256 U1.42@49.824,92.256
  Bottom Layer w0.254: v1(43.332,93.472) 43.332,118.262 43.815,118.745 59.919,118.745 60.3,118.364 J7.4@60.3,116.307
TXD2: U1.16 U22.11 | length 54.4
  Top Layer w0.254: U1.16@61.824,96.756 62.611,96.756 62.992,97.137 62.992,102.285 64.187,103.48 91.973,103.48 93.142,104.648 100.381,104.648 100.838,104.191 100.838,97.079 100.388,96.629 U22.11@99.217,96.629
TXD3: R18.2 U1.51 | length 26.3
  Top Layer w0.254: R18.2@28.537,85.496 29.553,86.512 50.343,86.512 51.765,87.935 52.807,87.935 53.074,87.668 U1.51@53.074,87.006
V1N: C56.1 R62.2 U5.6 | length 5.4
  Top Layer w0.254: R62.2@11.417,89.281 11.455,89.281 11.938,89.764 12.84,89.764 C56.1@13.335,89.268 ; C56.1@13.392,89.211 13.83,89.649 U5.6@16.279,89.649
V1P: C54.1 R53.2 U5.5 | length 5.4
  Top Layer w0.254: R53.2@11.417,90.678 11.9,90.195 12.84,90.195 C54.1@13.335,90.691 ; C54.1@13.379,90.735 13.83,90.284 U5.5@16.279,90.284
V3N: C57.1 R63.2 U5.3 | length 28.1
  Top Layer w0.254: R63.2@4.851,76.517 5.359,77.025 5.359,82.474 5.994,83.109 16.256,83.109 18.059,84.912 18.059,91.261 17.766,91.554 U5.3@16.279,91.554
V3P: C55.1 R56.2 U5.2 | length 29.2
  Top Layer w0.254: R56.2@6.274,76.517 5.791,77 5.791,82.295 6.173,82.677 16.435,82.677 18.491,84.733 18.491,91.44 17.742,92.189 U5.2@16.279,92.189 ; C55.1@18.771,86.271 C55.1@18.936,86.106
VDD5V: C5.1@20.041,73.774 C6.1@17.501,73.749 C65.2 C66.2 EC4.1 J13.6 R7.2@31.623,73.787 R8.1@31.229,78.994 R33.2 U2.5 U4.3 U19.8 | length 152.3
  Top Layer w0.508: U19.8@101.426,74.229 106.398,74.229 108.56,74.229
  Top Layer w0.762: R7.2@31.204,74.206 R8.1@31.204,78.994 ; R7.2@31.623,73.787 33.96,73.787 v2(33.985,73.762) ; C65.2@106.375,74.206 106.398,74.229 106.401,74.231 R33.2@106.401,76.136 ; J13.6@107.213,103.2 108.61,101.803 v2(108.61,68.453)
  Top Layer w1.27: U4.3@15.152,73.733 15.155,73.736 EC4.1@25.69,73.736 31.572,73.736 R7.2@31.623,73.787 ; U2.5@25.693,66.275 EC4.1@25.693,73.736
  Bottom Layer w0.762: v2@33.985,73.736 48.387,73.736 53.696,68.428 v2@108.61,68.428
VDDA: C37.1 C38.1 FB1.2 U1.13 | length 7.2
  Top Layer w0.254: U1.13@61.824,95.256 63.887,95.256 65.164,96.533 FB1.2@65.164,99.873
WDI: R36.2 U1.15 U10.6 | length 43.8
  Top Layer w0.254: U1.15@61.824,96.256 62.855,96.256 63.5,96.901 63.5,102.108 63.906,102.514 v1(86.919,102.514) ; R36.2@85.979,94.882 v1(86.906,94.882) ; U10.6@86.024,90.392 86.024,94.647 R36.2@86.265,94.647
  Bottom Layer w0.254: v1(86.906,94.882) 86.919,94.869 v1(86.919,102.514)
pads on no net: J1.6 J1.7 J1.8 J1.9 J1.10 J1.11 J13.4 U1.2 U1.8 U1.9 U1.10 U1.39 U1.40 U1.41 U1.44 U1.45 U1.61 U1.62 U2. U4.4 U5.4 U5.9 U10.5 U15.1 U15.5 U15.8 U17.7 U17.8 U18.5 U18.6 U18.7 U19.5 U19.6 U19.7 U21.6 U21.19 U22.7 U22.8 U22.9 U22.10 Y2.3 Y3.3
copper on no net: | length 37.7
  Top Layer w0.1: 3.684,15.748 ccw(c2.184,15.748) 3.684,15.748 ; 100.712,107.493 ccw(c99.212,107.493) 100.712,107.493
  Bottom Layer w0.1: 3.684,15.748 ccw(c2.184,15.748) 3.684,15.748 ; 100.712,107.493 ccw(c99.212,107.493) 100.712,107.493
  other v1: 7.5,117.5

## Polygon pours and split planes (outlines as drawn)
DGND on Bottom Layer "Top Layer-DGND" (solid, remove dead copper, pour order 5): 207.5,120.04 207.5,125.04 207.5,147.54 201.5,147.54 199,147.54 152.5,147.54 152.5,140.04 152.5,120.04 207.5,120.04
DGND on Bottom Layer "Top Layer-DGND" (solid, remove dead copper, pour order 5): 135.5,120.04 135.5,125.04 135.5,147.54 129.5,147.54 127,147.54 80.5,147.54 80.5,140.04 80.5,120.04 135.5,120.04
DGND on Bottom Layer "Top Layer-DGND" (solid, remove dead copper, pour order 5): 63.5,120.04 63.5,125.04 63.5,147.54 57.5,147.54 55,147.54 8.5,147.54 8.5,140.04 8.5,120.04 63.5,120.04
ASS_GND on Bottom Layer "Top Layer-ASS_GND" (solid, remove dead copper, pour order 25): 49.75,58.5 52.5,58.5 57,58.5 110,58.5 110,56.75 110,18 108.5,18 94,18 94,17.25 94,7 91.5,7 68.25,7 68.25,10 68.25,36.25 67,36.25 51.25,36.25 49.75,37.75 49.75,38.75 49.75,58.5
DGND on Bottom Layer "BO-Layer-DGND" (solid, remove dead copper, pour order 22): 0,120 16,120 110,120 110,116 110,63 108,63 50,63 50,71 44,71 0,71 0,75 0,120
DGND on Top Layer "top-No Net" (solid, remove dead copper, pour order 6): 207.5,120.04 207.5,125.04 207.5,147.54 201.5,147.54 199,147.54 152.5,147.54 152.5,140.04 152.5,120.04 207.5,120.04
DGND on Top Layer "top-No Net" (solid, remove dead copper, pour order 6): 135.5,120.04 135.5,125.04 135.5,147.54 129.5,147.54 127,147.54 80.5,147.54 80.5,140.04 80.5,120.04 135.5,120.04
DGND on Top Layer "top-No Net" (solid, remove dead copper, pour order 6): 63.5,120.04 63.5,125.04 63.5,147.54 57.5,147.54 55,147.54 8.5,147.54 8.5,140.04 8.5,120.04 63.5,120.04
ASS_GND on Top Layer "top-No Net" (solid, remove dead copper, pour order 24): 49.75,58.5 52.5,58.5 57,58.5 110,58.5 110,56.75 110,18 108.5,18 94,18 94,17.25 94,7 91.5,7 68.25,7 68.25,10 68.25,36.25 67,36.25 51.25,36.25 49.75,37.75 49.75,38.75 49.75,58.5
DGND on Top Layer "top-No Net" (solid, remove dead copper, pour order 23): 0,120 16,120 110,120 110,116 110,63 108,63 50,63 50,71 44,71 0,71 0,75 0,120

## Keep-outs
Keep-Out Layer:
  circle w0.254: c149,125.04 r1.6
  circle w0.254: c211,125.04 r1.6
  circle w0.254: c211,181.04 r1.6
  circle w0.254: c149,181.04 r1.6
  circle w0.254: c77,125.04 r1.6
  circle w0.254: c139,125.04 r1.6
  circle w0.254: c139,181.04 r1.6
  circle w0.254: c77,181.04 r1.6
  circle w0.254: c5,125.04 r1.6
  circle w0.254: c67,125.04 r1.6
  circle w0.254: c67,181.04 r1.6
  circle w0.254: c5,181.04 r1.6
  circle w0.2: c105,112 r2.25
  lines w0.2: -0.04,185 -5,185 -5,120 ; 110,0 114,0 ; -5,120 -5,0 4,0 ; -5,120 4,120 ; 4,0 cw(c4,4) 0,4 0,54.998 0,116 cw(c4,116) 4,120 ; 4,0 106,0 ; 4,120 106,120 ; 72,120.04 72,185.04 ; 72,120.04 144,120.04 ; 72,120.04 72,185.04 ; 72,120.04 0,120.04 0,185.04 72,185.04 ; 72,185.04 144,185.04 ; 106,0 ccw(c106,4) 110,4 ; 106,0 220,0 ; 106,120 cw(c106,116) 110,116 ; 106,120 220,120 ; 110,4 ccw(c114,4) 114,0 ; 110,4 110,116 ; 110,4 110,54.998 ; 110,4 110,54.998 ; 110,54.998 110,116 ; 110,54.998 110,116 ; 110,116 cw(c114,116) 114,120 216,120 cw(c216,116) 220,116 220,4 cw(c216,4) 216,0 114,0 ; 144,120.04 144,185.04 ; 144,120.04 216,120.04 216,185.04 ; 144,120.04 144,185.04 ; 144,185.04 216,185.04 ; 216,185.04 216.04,185 225,185 225,120 ; 220,0 220,120 ; 220,0 225,0 225,120 ; 220,120 225,120
  lines w1: 11,7.5 11,12.5 ; 20,7.5 20,12.5 ; 27.5,7.5 27.5,12.5 ; 47.5,35 55,27.5 55,22.5 ; 60,25 66.116,18.884 66.116,5
  lines w2: 29.512,124.028 42.012,124.028 ; 101.512,124.028 114.012,124.028 ; 173.512,124.028 186.012,124.028

## Silkscreen, mask and mechanical layers (free items; w line width, h text height)
Top Overlay:
  drawing of 4455 lines, arcs and shapes, not listed
  text "UE-12864LCD-V1.0" at 25.832,159.36 h1.6
  text "UE-12864LCD-V1.0" at 97.832,159.36 h1.6
  text "UE-12864LCD-V1.0" at 169.832,159.36 h1.6
  text "20170919" at 36.906,155.626 h1.6
  text "20170919" at 108.906,155.626 h1.6
  text "20170919" at 180.906,155.626 h1.6
  text "金属螺丝" at 2.642,117.653 h1.2
  text "灯板接口" at 69.24,111.836 h1.5
  text "校准接口" at 53.772,111.811 h1.5
  text "SWD接口" at 39.268,111.76 h1.5
  text "显示屏接口" at 86.538,111.709 h1.5
  text "UE-EVPO-AC1-V2.0" at 63.043,104.318 h1.3
  text "刷卡板2" at 86,102 h1.5
  text "20170912" at 73.228,101.498 h1.3
  text "刷卡板1" at 6.502,97.409 h1.2
  text "+" at 0.508,94.209 h2
  text "-" at 1.422,84.887 h2 r90
  text "电流互感器" at 0.787,82.702 h1.2
  text "手动复位" at 77.876,73.406 h1.5
  text "校准----屏" at 66.065,73.076 h1.5
  text "FG" at 22.225,12.192 h1.52
  text "ACL" at 14.529,12.167 h1.52
  text "ACN" at 29.718,12.167 h1.52
  text "ST2" at 45.314,12.116 h1.52
  text "ST1" at 37.617,12.09 h1.52
  text "103" at 52.807,12.09 h1.52
  text "104" at 60.579,12.09 h1.52
  text "STOP" at 67.869,9.855 h1.52
  text "G" at 72.085,9.855 h1.52
  text "START" at 74.346,9.855 h1.52
  text "G" at 79.68,9.855 h1.52
  text "SW.D" at 83.566,9.855 h1.52
  text "G" at 87.935,9.83 h1.52
  text "CP" at 91.415,9.83 h1.52
  text "FG" at 94.869,9.83 h1.52
  text "金属螺丝" at 2.54,1.448 h1.2
Mechanical 1:
  circle w0.2: c5,10 r2.25
  circle w0.2: c5,112 r2.25
  lines w0.2: 0,102.75 4.25,102.75 4.25,106.375 10.16,106.375 10.16,120
  lines w0.254: 0,71.12 49.784,71.12 49.784,62.992 96.774,62.992 110,62.992 ; 62.5,36.246 68.25,36.246 68.25,0 ; 62.5,36.25 51.25,36.25 49.75,37.75 49.75,58.5 109.948,58.5 ; 68.25,7 94,7 94,13.75 94,18 110,18
Mechanical 2:
  circle w0.127: c-11,210 r5
  circle w0.127: c-11,110 r5
  circle w0.127: c-11,10 r5
  circle w0.127: c117,110 r5
  circle w0.127: c117,10 r5
  circle w0.127: c117,210 r5
  circle w0.127: c-11,110 r2.25
  circle w0.127: c-11,210 r2.25
  circle w0.127: c117,210 r2.25
  circle w0.127: c304.7,210.6 r2.25
  circle w0.127: c266.96,205.6 r2.5
  circle w0.127: c240.7,205.6 r2.5
  circle w0.127: c304.7,10.6 r2.25
  circle w0.127: c304.7,110.6 r2.25
  circle w0.127: c214.44,205.6 r2.5
  circle w0.127: c176.7,210.6 r2.25
  circle w0.127: c176.7,10.6 r2.25
  circle w0.127: c176.7,110.6 r2.25
  circle w0.127: c79.26,205 r2.5
  circle w0.127: c53,205 r2.5
  circle w0.127: c26.74,205 r2.5
  lines w0.127: -16,-9.5 ccw(c-15.5,-9.5) -15.5,-10 121.5,-10 ccw(c121.5,-9.5) 122,-9.5 ; -16,120 -10.652,120 ; -16,130 -10.83,130 ; -16,190 -10.652,190 ; -16,200 -10.83,200 ; -11,120 ccw(c-11,125) -11,130 ; -11,190 ccw(c-11,195) -11,200 ; 0,0 122,0 ; 116.652,130 122,130 ; 116.652,200 122,200 ; 116.83,120 122,120 ; 116.83,190 122,190 ; 117,120 cw(c117,125) 117,130 ; 117,190 cw(c117,195) 117,200 ; 122,0 122,15 106,15 106,105 122,105 122,121 117,121 cw(c117,125) 117,129 122,129 122,191 117,191 cw(c117,195) 117,199 122,199 122,229.5 ccw(c121.5,229.5) 121.5,230 -15.5,230 ccw(c-15.5,229.5) -16,229.5 -16,199 -11,199 cw(c-11,195) -11,191 -16,191 -16,129 -11,129 cw(c-11,125) -11,121 -16,121 -16,105 0,105 0,15 -16,15 -16,0 122,0 ; 19.74,146.71 86.26,146.71 86.26,180 19.74,180 19.74,146.71 ; 171.7,-8.9 ccw(c172.2,-8.9) 172.2,-9.4 309.2,-9.4 ccw(c309.2,-8.9) 309.7,-8.9 309.7,15.6 293.7,15.6 293.7,105.6 309.7,105.6 309.7,121.6 304.7,121.6 cw(c304.7,125.6) 304.7,129.6 309.7,129.6 309.7,191.6 304.7,191.6 cw(c304.7,195.6) 304.7,199.6 309.7,199.6 309.7,230.1 ccw(c309.2,230.1) 309.2,230.6 172.2,230.6 ccw(c172.2,230.1) 171.7,230.1 171.7,199.6 176.7,199.6 cw(c176.7,195.6) 176.7,191.6 171.7,191.6 171.7,129.6 176.7,129.6 cw(c176.7,125.6) 176.7,121.6 171.7,121.6 171.7,105.6 187.7,105.6 187.7,15.6 171.7,15.6 171.7,-8.9 ; 207.44,147.31 273.96,147.31 273.96,180.6 207.44,180.6 207.44,147.31
  lines w0.2: 0,54.998 0,160 ; 0,170 5.17,170 ; 0,200 0,199 5,199 cw(c5,195) 5,191 0,191 0,169 5,169 cw(c5,165) 5,161 0,161 0,160 ; 0.025,190.025 5.373,190.025 ; 0.025,200.025 5.196,200.025 ; 5,160 ccw(c5,165) 5,170 ; 5.025,190.025 ccw(c5.025,195.025) 5.025,200.025 ; 5.348,160 0,160 ; 92.558,181.897 92.558,185.884 ; 100.621,170.035 105.969,170.035 ; 100.652,200 106,200 106,199 101,199 ccw(c101,195) 101,191 106,191 106,169 101,169 ccw(c101,165) 101,161 106,161 106,160 106,54.998 ; 100.799,160.035 105.969,160.035 ; 100.83,190 106,190 ; 100.969,160.035 cw(c100.969,165.035) 100.969,170.035 ; 101,190 cw(c101,195) 101,200

## Text inside footprints (layer, text, board x,y; h text height)
EC1: Top Overlay "+" at 99.084,30.921 h1.02
EC2: Top Overlay "+" at 65.541,47.804 h1.02 r270
EC3: Top Overlay "+" at 67.41,44.357 h1.02
EC4: Top Overlay "+" at 23.384,72.414 h1.02 r90
EC5: Top Overlay "+" at 40.192,99.976 h1.02 r270
J1: Top Overlay "20" at 183.356,134.656 h0.6; Top Overlay "1" at 174.872,134.656 h0.6
J1: Top Overlay "20" at 111.356,134.656 h0.6; Top Overlay "1" at 102.872,134.656 h0.6
J1: Top Overlay "20" at 39.356,134.656 h0.6; Top Overlay "1" at 30.872,134.656 h0.6
J3: Bottom Overlay "A" at 157.005,129.87 h0.8; Bottom Overlay "K" at 198.305,129.997 h0.8; Mechanical 1 "20" at 184.894,106.883 h0.7; Mechanical 1 "1" at 175.42,106.858 h0.7
J3: Bottom Overlay "A" at 85.005,129.87 h0.8; Bottom Overlay "K" at 126.305,129.997 h0.8; Mechanical 1 "20" at 112.894,106.883 h0.7; Mechanical 1 "1" at 103.42,106.858 h0.7
J3: Bottom Overlay "A" at 13.005,129.87 h0.8; Bottom Overlay "K" at 54.305,129.997 h0.8; Mechanical 1 "20" at 40.894,106.883 h0.7; Mechanical 1 "1" at 31.42,106.858 h0.7
SW1: Top Overlay "ON" at 66.063,75.097 h0.76
SW3: Top Overlay "ON" at 81.139,84.021 h0.76 r90